# Altium PCB LPS.PcbDoc
Units mm, origin at the board's own origin, x right, y up, seen from the top; angles counter-clockwise.
Board outline 50 x 100 mm, 2 copper layers (Top Layer, Bottom Layer); 35 components, 20 nets, 87 pads, 8 vias.
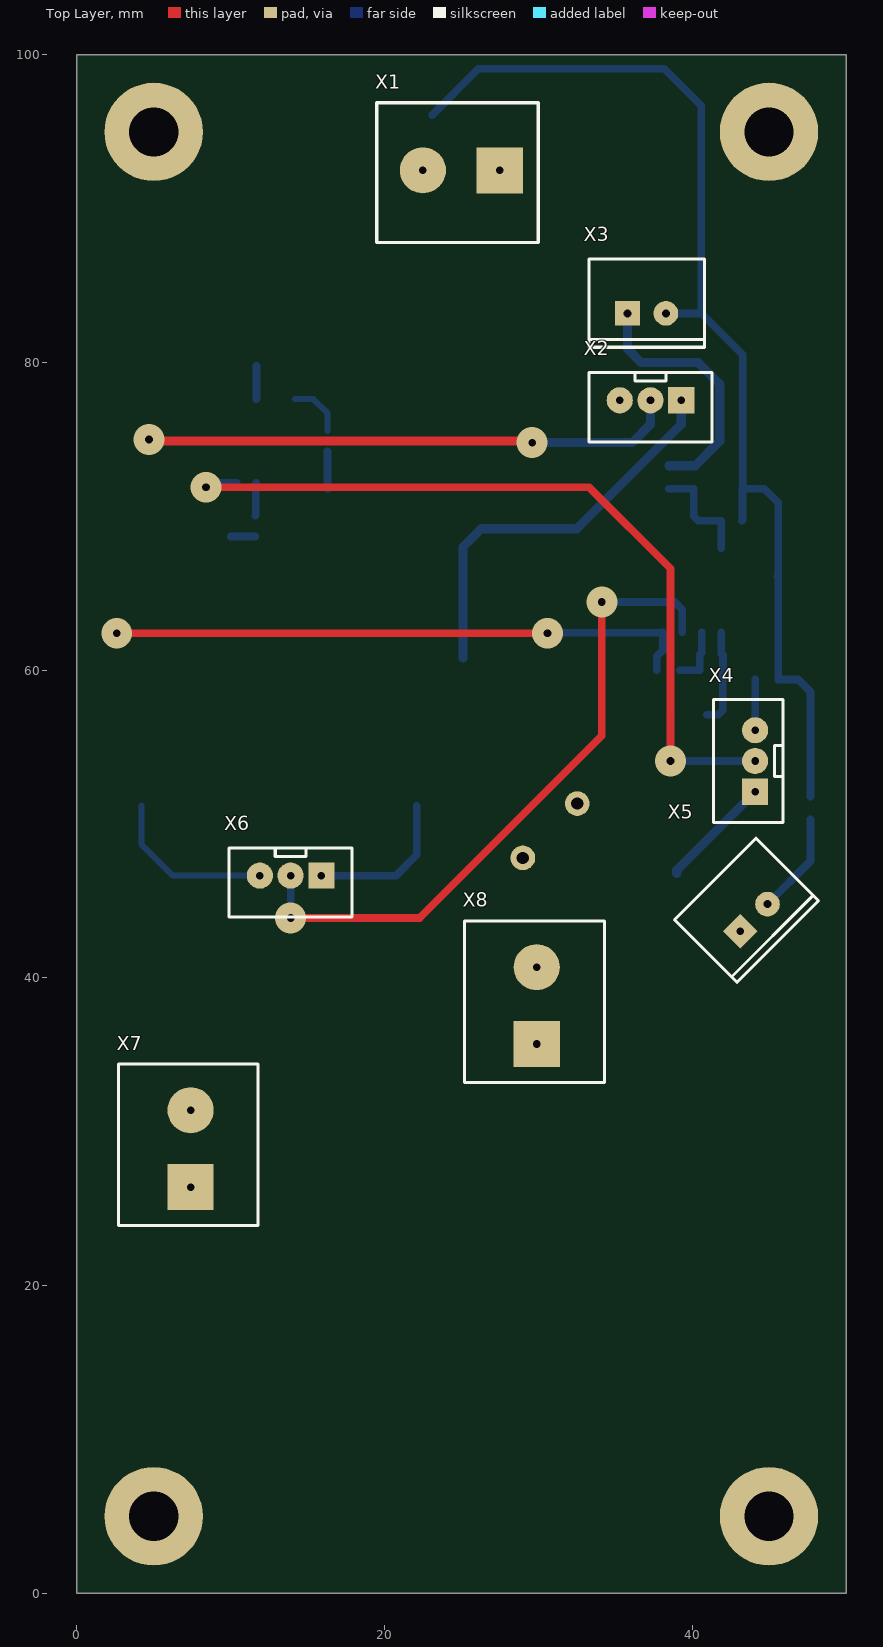
[diagram p0: Top Layer view]
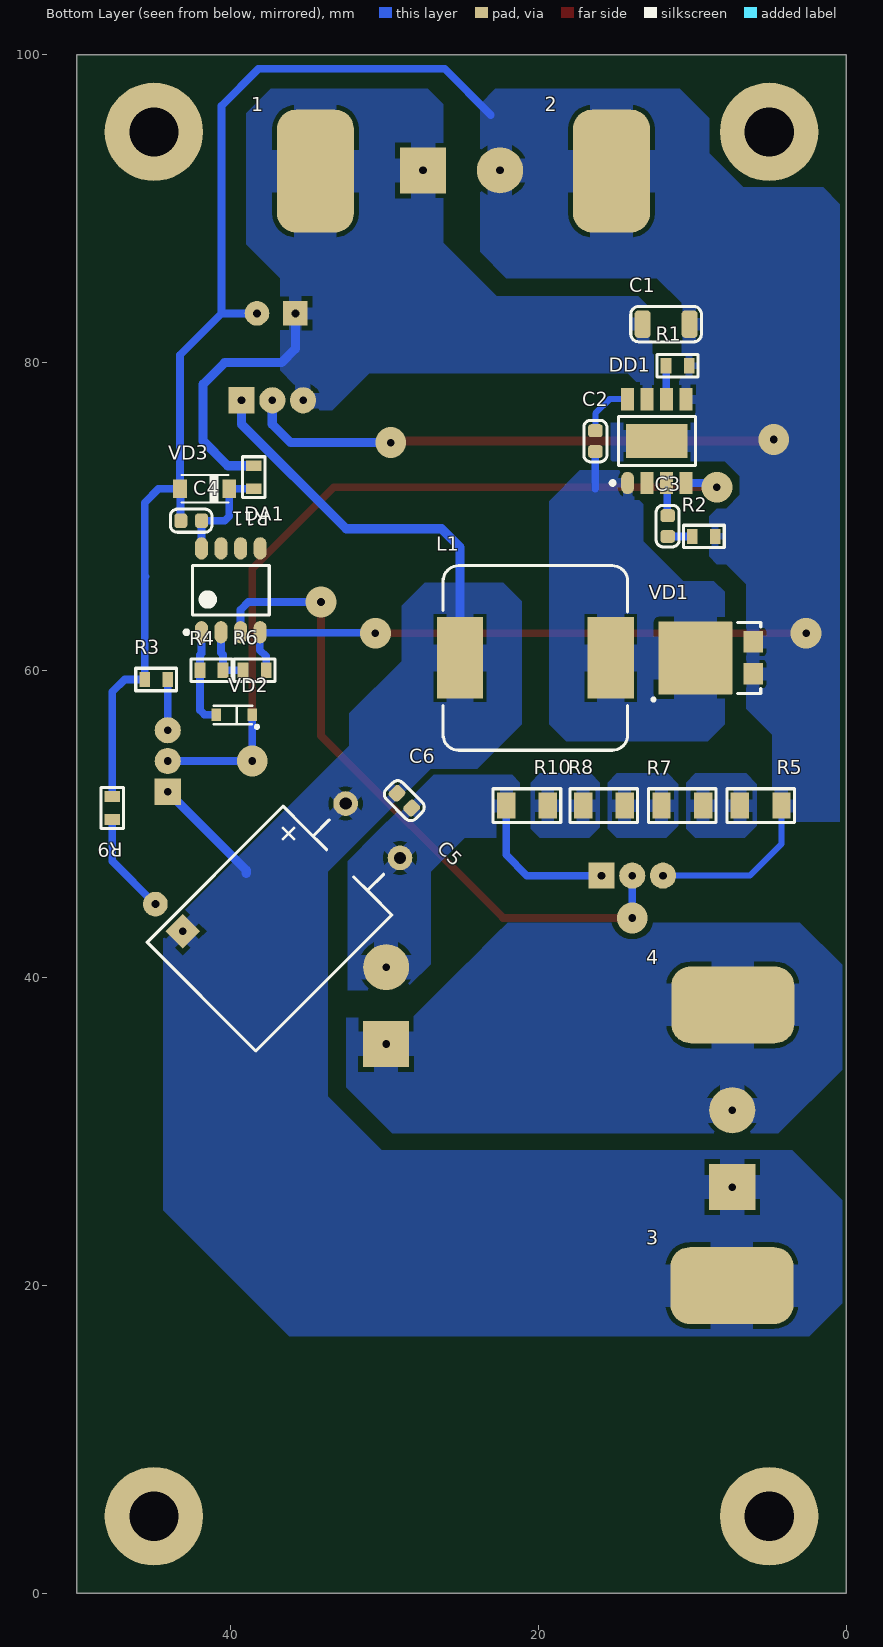
[diagram p1: Bottom Layer view, seen from below]
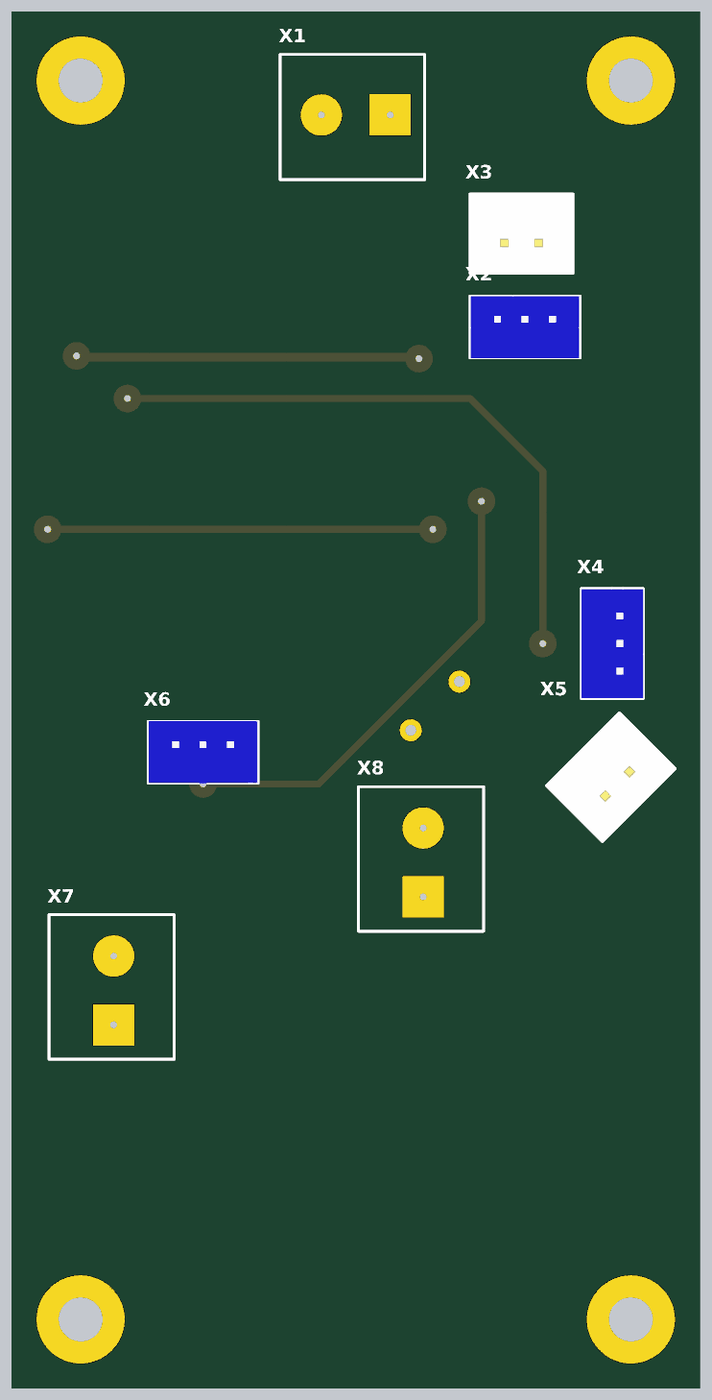
[diagram p2: 3D render of the assembled board from above, using the file's embedded part models]

## Layer stack, top to bottom
Top Solder: solder mask 0.0102, Solder Resist, Dk 3.5
Top Layer: signal copper 0.0356
Dielectric 1: dielectric 0.32, FR-4, Dk 4.8
Bottom Layer: signal copper 0.0356
Bottom Solder: solder mask 0.0102, Solder Resist, Dk 3.5

## Board outline
0.006,0.006 50.006,0.006 50.006,100.006 0.006,100.006

## Design rules (kind name [scope] priority, off if disabled: settings)
AcuteAngle min_acute_angle [OnCopper] p1: minimum=3.50000000000000E+0001 checktracksonly=FALSE // Минимальный угол между примитивами топологии
BoardOutlineClearance board_outline_clearance_std [NOT (OnLayer('Bottom Overlay') OR OnLayer('Top Overlay'))] p1: gap=0.25 ignorepadtopadclearanceinfootprint=FALSE except(0: Arc-SplitContinuation Track-SplitContinuation SMDPad-SplitContinuation THPad-SplitContinuation Via-SplitContinuation Fill-SplitContinuation Poly-SplitContinuation Region-SplitContinuation Text-SplitContinuation) // Отступ элементов топологии от края фрезеруемой печатной платы
Clearance clearance_poly_to_diff [InPolygonClass('FILL') vs InAnyDifferentialPair] p1: gap=0.2 ignorepadtopadclearanceinfootprint=FALSE except(0.25: Arc-Hole Track-Hole SMDPad-Hole THPad-Hole Via-Hole Fill-Hole Poly-Hole Region-Hole Text-Hole; 0.5: Arc-Poly Track-Poly SMDPad-Poly THPad-Poly Via-Poly) // Зазор между полигоном и дифференциальной парой
Clearance clearance_outer_35um_std [OnTopLayer OR OnBottomLayer] p2: gap=0.4 ignorepadtopadclearanceinfootprint=FALSE // Зазоры на внешних слоях
Clearance clearance_inner_35um_std [NOT (OnTopLayer Or OnBottomLayer)] p3: gap=0.2 ignorepadtopadclearanceinfootprint=FALSE except(0.25: Arc-Hole Track-Hole SMDPad-Hole THPad-Hole Via-Hole Fill-Hole Poly-Hole Region-Hole Text-Hole) // Зазоры на внутренних слоях
ComponentClearance [All] p1: gap=0 collisioncheckmode=3 verticalgap=0 showdistances=FALSE
DiffPairsRouting diff_pairs_routing [All] p1: maxlimit=0.127 minlimit=0.127 mostfreqgap=0.127 toplayer_minwidth=0.143 toplayer_maxwidth=0.143 toplayer_prefwidth=0.143 bottomlayer_minwidth=0.143 bottomlayer_maxwidth=0.143 bottomlayer_prefwidth=0.143 impedanceprofiledriven=TRUE impedanceprofileid={FD46899E-B5A2-4EF5-A302-5D2DB6A51F35} maxuncoupledlength=12.7 // Правила трассировки дифференциальных пар
HoleSize min_hole_size_std [IsPad] p1: absolutevalues=TRUE maxlimit=5.9 minlimit=0.6 maxpercent=80.000 minpercent=20.000 // Диаметр межслойного переходного отверстия
HoleSize min_hole_size_via_std [IsVia] p2: absolutevalues=TRUE maxlimit=5.9 minlimit=0.3 maxpercent=80.000 minpercent=20.000 // Минимальный диаметр монтажного отверстия
HoleToHoleClearance hole_to_hole_clearance_std [All] p1: gap=0.2 allowstackedmicrovias=FALSE // Минимальное расстояние между краями двух отверстий
MinimumAnnularRing min_via_ar_std [All] p1: minimumring=0.15 // Поясок площадки переходного отверстия (Annular ring VIA)
MinimumAnnularRing min_pad_ar_std [All] p2: minimumring=0.2 // Поясок монтажной контактной площадки (Annular ring PAD)
MinimumSolderMaskSliver min_solder_mask_bridge_std [All] p1: minsoldermaskwidth=0.15 // Мнимальная ширина масочного мостика
PlaneClearance plane_clearance_antipads [InAnyDifferentialPair] p1: clearance=0.5 // Отступ полигона от дифференциальных пар
PlaneClearance plane_clearance_35um_std [All] p2: clearance=0.2 // Отступ полигона (для слоя plane) от элементов топологии
PlaneConnect "plane_connect_to pad<=0.3" [(AsMM(PadXSize_AllLayers)<=0.301) or (AsMM(PadYSize_AllLayers)<=0.301)] p1 off: pad.planeconnectstyle=Relief pad.reliefexpansion=0.2 pad.reliefentries=4 pad.reliefconductorwidth=0.2 pad.reliefairgap=0.2 via.planeconnectstyle=Direct via.reliefexpansion=0.5 via.reliefentries=4 via.reliefconductorwidth=0.2 via.reliefairgap=0.2 // Правила подключения полигонов для падов от 0,3мм и меньше
PlaneConnect "plane_connect_to pad<=0.4" [(AsMM(PadXSize_AllLayers)<=0.401) or (AsMM(PadYSize_AllLayers)<=0.401)] p2 off: pad.planeconnectstyle=Relief pad.reliefexpansion=0.2 pad.reliefentries=4 pad.reliefconductorwidth=0.2 pad.reliefairgap=0.3 via.planeconnectstyle=Direct via.reliefexpansion=0.5 via.reliefentries=4 via.reliefconductorwidth=0.2 via.reliefairgap=0.2 // Правила подключения полигонов для падов от 0,4мм и меньше
PlaneConnect "plane_connect_to pad<=0.6" [(AsMM(PadXSize_AllLayers)<=0.601) or (AsMM(PadYSize_AllLayers)<=0.601)] p3 off: pad.planeconnectstyle=Relief pad.reliefexpansion=0.2 pad.reliefentries=4 pad.reliefconductorwidth=0.3 pad.reliefairgap=0.3 via.planeconnectstyle=Direct via.reliefexpansion=0.5 via.reliefentries=4 via.reliefconductorwidth=0.2 via.reliefairgap=0.2 // Правила подключения полигонов для падов от 0,6мм и меньше
PlaneConnect "plane_connect_to pad<=0.7" [(AsMM(PadXSize_AllLayers)<=0.701) or (AsMM(PadYSize_AllLayers)<=0.701)] p4 off: pad.planeconnectstyle=Relief pad.reliefexpansion=0.6 pad.reliefentries=4 pad.reliefconductorwidth=0.35 pad.reliefairgap=0.3 via.planeconnectstyle=Direct via.reliefexpansion=0.5 via.reliefentries=4 via.reliefconductorwidth=0.2 via.reliefairgap=0.2 // Правила подключения полигонов для падов от 0,7мм и меньше
PlaneConnect "plane_connect_to pad<=0.8" [(AsMM(PadXSize_AllLayers)<=0.801) or (AsMM(PadYSize_AllLayers)<=0.801)] p5 off: pad.planeconnectstyle=Relief pad.reliefexpansion=0.7 pad.reliefentries=4 pad.reliefconductorwidth=0.4 pad.reliefairgap=0.3 via.planeconnectstyle=Direct via.reliefexpansion=0.5 via.reliefentries=4 via.reliefconductorwidth=0.2 via.reliefairgap=0.2 // Правила подключения полигонов для падов от 0,8мм и меньше
PlaneConnect "plane_connect_to pad<=1" [(AsMM(PadXSize_AllLayers)<=1.01) or (AsMM(PadYSize_AllLayers)<=1.01)] p6 off: pad.planeconnectstyle=Relief pad.reliefexpansion=0.8 pad.reliefentries=4 pad.reliefconductorwidth=0.5 pad.reliefairgap=0.3 via.planeconnectstyle=Direct via.reliefexpansion=0.5 via.reliefentries=4 via.reliefconductorwidth=0.2 via.reliefairgap=0.2 // Правила подключения полигонов для падов от 1мм и меньше
PlaneConnect "plane_connect_to pad<=1.3" [(AsMM(PadXSize_AllLayers)<=1.31) or (AsMM(PadYSize_AllLayers)<=1.31)] p7 off: pad.planeconnectstyle=Relief pad.reliefexpansion=1.1 pad.reliefentries=4 pad.reliefconductorwidth=0.65 pad.reliefairgap=0.3 via.planeconnectstyle=Direct via.reliefexpansion=0.5 via.reliefentries=4 via.reliefconductorwidth=0.2 via.reliefairgap=0.2 // Правила подключения полигонов для падов от 1,3мм и меньше
PlaneConnect "plane_connect_to pad<=1.6" [(AsMM(PadXSize_AllLayers)<=1.61) or (AsMM(PadYSize_AllLayers)<=1.61)] p8 off: pad.planeconnectstyle=Relief pad.reliefexpansion=1.4 pad.reliefentries=4 pad.reliefconductorwidth=0.8 pad.reliefairgap=0.3 via.planeconnectstyle=Direct via.reliefexpansion=0.5 via.reliefentries=4 via.reliefconductorwidth=0.2 via.reliefairgap=0.2 // Правила подключения полигонов для падов от 1,6мм и меньше
PlaneConnect "plane_connect_to pad<=1.8" [(AsMM(PadXSize_AllLayers)<=1.81) or (AsMM(PadYSize_AllLayers)<=1.81)] p9 off: pad.planeconnectstyle=Relief pad.reliefexpansion=1.6 pad.reliefentries=4 pad.reliefconductorwidth=0.9 pad.reliefairgap=0.3 via.planeconnectstyle=Direct via.reliefexpansion=0.5 via.reliefentries=4 via.reliefconductorwidth=0.2 via.reliefairgap=0.2 // Правила подключения полигонов для падов от 1,8мм и меньше
PlaneConnect "plane_connect_to pad<=2" [(AsMM(PadXSize_AllLayers)<=2.01) or (AsMM(PadYSize_AllLayers)<=2.01)] p10 off: pad.planeconnectstyle=Relief pad.reliefexpansion=1.8 pad.reliefentries=4 pad.reliefconductorwidth=1 pad.reliefairgap=0.3 via.planeconnectstyle=Direct via.reliefexpansion=0.5 via.reliefentries=4 via.reliefconductorwidth=0.2 via.reliefairgap=0.2 // Правила подключения полигонов для падов от 2мм и меньше
PlaneConnect "plane_connect_to pad<=2.3" [(AsMM(PadXSize_AllLayers)<=2.31) or (AsMM(PadYSize_AllLayers)<=2.31)] p11 off: pad.planeconnectstyle=Relief pad.reliefexpansion=2.1 pad.reliefentries=4 pad.reliefconductorwidth=1.15 pad.reliefairgap=0.3 via.planeconnectstyle=Direct via.reliefexpansion=0.5 via.reliefentries=4 via.reliefconductorwidth=0.2 via.reliefairgap=0.2 // Правила подключения полигонов для падов от 2,3мм и меньше
PlaneConnect "plane_connect_to pad<=2.5" [(AsMM(PadXSize_AllLayers)<=2.51) or (AsMM(PadYSize_AllLayers)<=2.51)] p12 off: pad.planeconnectstyle=Relief pad.reliefexpansion=2.3 pad.reliefentries=4 pad.reliefconductorwidth=1.25 pad.reliefairgap=0.3 via.planeconnectstyle=Direct via.reliefexpansion=0.5 via.reliefentries=4 via.reliefconductorwidth=0.2 via.reliefairgap=0.2 // Правила подключения полигонов для падов от 2,5мм и меньше
PlaneConnect "plane_connect_to pad<=2.7" [(AsMM(PadXSize_AllLayers)<=2.71) or (AsMM(PadYSize_AllLayers)<=2.71)] p13 off: pad.planeconnectstyle=Relief pad.reliefexpansion=2.5 pad.reliefentries=4 pad.reliefconductorwidth=1.35 pad.reliefairgap=0.3 via.planeconnectstyle=Direct via.reliefexpansion=0.5 via.reliefentries=4 via.reliefconductorwidth=0.2 via.reliefairgap=0.2 // Правила подключения полигонов для падов от 2,7мм и меньше
PlaneConnect "plane_connect_to pad<=3" [(AsMM(PadXSize_AllLayers)<=3.01) or (AsMM(PadYSize_AllLayers)<=3.01)] p14 off: pad.planeconnectstyle=Relief pad.reliefexpansion=2.8 pad.reliefentries=4 pad.reliefconductorwidth=1.5 pad.reliefairgap=0.3 via.planeconnectstyle=Direct via.reliefexpansion=0.5 via.reliefentries=4 via.reliefconductorwidth=0.2 via.reliefairgap=0.2 // Правила подключения полигонов для падов от 3мм и меньше
PlaneConnect "plane_connect_to pad<=3.5" [(AsMM(PadXSize_AllLayers)<=3.51) or (AsMM(PadYSize_AllLayers)<=3.51)] p15 off: pad.planeconnectstyle=Relief pad.reliefexpansion=3.3 pad.reliefentries=4 pad.reliefconductorwidth=1.75 pad.reliefairgap=0.4 via.planeconnectstyle=Direct via.reliefexpansion=0.5 via.reliefentries=4 via.reliefconductorwidth=0.2 via.reliefairgap=0.2 // Правила подключения полигонов для падов от 3.5мм и меньше
PlaneConnect "plane_connect_to pad<=4" [(AsMM(PadXSize_AllLayers)<=4.01) or (AsMM(PadYSize_AllLayers)<=4.01)] p16 off: pad.planeconnectstyle=Relief pad.reliefexpansion=3.8 pad.reliefentries=4 pad.reliefconductorwidth=2 pad.reliefairgap=0.4 via.planeconnectstyle=Direct via.reliefexpansion=0.5 via.reliefentries=4 via.reliefconductorwidth=0.2 via.reliefairgap=0.2 // Правила подключения полигонов для падов от 4мм и меньше
PlaneConnect "plane_connect_to pad<=4.5" [(AsMM(PadXSize_AllLayers)<=4.51) or (AsMM(PadYSize_AllLayers)<=4.51)] p17 off: pad.planeconnectstyle=Relief pad.reliefexpansion=4.3 pad.reliefentries=4 pad.reliefconductorwidth=2.25 pad.reliefairgap=0.4 via.planeconnectstyle=Direct via.reliefexpansion=0.5 via.reliefentries=4 via.reliefconductorwidth=0.2 via.reliefairgap=0.2 // Правила подключения полигонов для падов от 4.5мм и меньше
PlaneConnect "plane_connect_to pad<=5" [(AsMM(PadXSize_AllLayers)<=5.01) or (AsMM(PadYSize_AllLayers)<=5.01)] p18 off: pad.planeconnectstyle=Relief pad.reliefexpansion=4.8 pad.reliefentries=4 pad.reliefconductorwidth=2.5 pad.reliefairgap=0.4 via.planeconnectstyle=Direct via.reliefexpansion=0.5 via.reliefentries=4 via.reliefconductorwidth=0.2 via.reliefairgap=0.2 // Правила подключения полигонов для падов от 5мм и меньше
PlaneConnect "plane_connect_to pad<=5.5" [(AsMM(PadXSize_AllLayers)<=5.51) or (AsMM(PadYSize_AllLayers)<=5.51)] p19 off: pad.planeconnectstyle=Relief pad.reliefexpansion=5.3 pad.reliefentries=4 pad.reliefconductorwidth=2.75 pad.reliefairgap=0.4 via.planeconnectstyle=Direct via.reliefexpansion=0.5 via.reliefentries=4 via.reliefconductorwidth=0.2 via.reliefairgap=0.2 // Правила подключения полигонов для падов от 5,5мм и меньше
PlaneConnect "plane_connect_to pad<=6" [(AsMM(PadXSize_AllLayers)<=6.01) or (AsMM(PadYSize_AllLayers)<=6.01)] p20 off: pad.planeconnectstyle=Relief pad.reliefexpansion=5.8 pad.reliefentries=4 pad.reliefconductorwidth=3 pad.reliefairgap=0.5 via.planeconnectstyle=Direct via.reliefexpansion=0.5 via.reliefentries=4 via.reliefconductorwidth=0.2 via.reliefairgap=0.2 // Правила подключения полигонов для падов от 6мм и меньше
PlaneConnect "plane_connect_to pad<=6.5" [(AsMM(PadXSize_AllLayers)<=6.51) or (AsMM(PadYSize_AllLayers)<=6.51)] p21 off: pad.planeconnectstyle=Relief pad.reliefexpansion=6.3 pad.reliefentries=4 pad.reliefconductorwidth=3.25 pad.reliefairgap=0.5 via.planeconnectstyle=Direct via.reliefexpansion=0.5 via.reliefentries=4 via.reliefconductorwidth=0.2 via.reliefairgap=0.2 // Правила подключения полигонов для падов от 6,5мм и меньше
PlaneConnect "plane_connect_to pad<=7" [(AsMM(PadXSize_AllLayers)<=7.01) or (AsMM(PadYSize_AllLayers)<=7.01)] p22 off: pad.planeconnectstyle=Relief pad.reliefexpansion=6.8 pad.reliefentries=4 pad.reliefconductorwidth=3.5 pad.reliefairgap=0.5 via.planeconnectstyle=Direct via.reliefexpansion=0.5 via.reliefentries=4 via.reliefconductorwidth=0.2 via.reliefairgap=0.2 // Правила подключения полигонов для падов от 7мм и меньше
PlaneConnect "plane_connect_to pad<=7.5" [(AsMM(PadXSize_AllLayers)<=7.51) or (AsMM(PadYSize_AllLayers)<=7.51)] p23 off: pad.planeconnectstyle=Relief pad.reliefexpansion=7.3 pad.reliefentries=4 pad.reliefconductorwidth=3.75 pad.reliefairgap=0.5 via.planeconnectstyle=Direct via.reliefexpansion=0.5 via.reliefentries=4 via.reliefconductorwidth=0.2 via.reliefairgap=0.2 // Правила подключения полигонов для падов от 7,5мм и меньше
PlaneConnect "plane_connect_to pad<=8" [(AsMM(PadXSize_AllLayers)<=8.01) or (AsMM(PadYSize_AllLayers)<=8.01)] p24 off: pad.planeconnectstyle=Relief pad.reliefexpansion=7.8 pad.reliefentries=4 pad.reliefconductorwidth=4 pad.reliefairgap=0.5 via.planeconnectstyle=Direct via.reliefexpansion=0.5 via.reliefentries=4 via.reliefconductorwidth=0.2 via.reliefairgap=0.2 // Правила подключения полигонов для падов от 8мм и меньше
PlaneConnect "plane_connect_to pad<=8.5" [(AsMM(PadXSize_AllLayers)<=8.51) or (AsMM(PadYSize_AllLayers)<=8.51)] p25 off: pad.planeconnectstyle=Relief pad.reliefexpansion=8.3 pad.reliefentries=4 pad.reliefconductorwidth=4.25 pad.reliefairgap=0.5 via.planeconnectstyle=Direct via.reliefexpansion=0.5 via.reliefentries=4 via.reliefconductorwidth=0.2 via.reliefairgap=0.2 // Правила подключения полигонов для падов от 8,5мм и меньше
PlaneConnect "plane_connect_to pad<=9" [(AsMM(PadXSize_AllLayers)<=9.01) or (AsMM(PadYSize_AllLayers)<=9.01)] p26 off: pad.planeconnectstyle=Relief pad.reliefexpansion=8.8 pad.reliefentries=4 pad.reliefconductorwidth=4.5 pad.reliefairgap=0.5 via.planeconnectstyle=Direct via.reliefexpansion=0.5 via.reliefentries=4 via.reliefconductorwidth=0.2 via.reliefairgap=0.2 // Правила подключения полигонов для падов от 9мм и меньше
PlaneConnect "plane_connect_to pad<=9.5" [(AsMM(PadXSize_AllLayers)<=9.51) or (AsMM(PadYSize_AllLayers)<=9.51)] p27 off: pad.planeconnectstyle=Relief pad.reliefexpansion=9.3 pad.reliefentries=4 pad.reliefconductorwidth=4.75 pad.reliefairgap=0.5 via.planeconnectstyle=Direct via.reliefexpansion=0.5 via.reliefentries=4 via.reliefconductorwidth=0.2 via.reliefairgap=0.2 // Правила подключения полигонов для падов от 9,5мм и меньше
PlaneConnect "plane_connect_to pad<=10" [(AsMM(PadXSize_AllLayers)<=10.01) or (AsMM(PadYSize_AllLayers)<=10.01)] p28 off: pad.planeconnectstyle=Relief pad.reliefexpansion=9.8 pad.reliefentries=4 pad.reliefconductorwidth=5 pad.reliefairgap=0.5 via.planeconnectstyle=Direct via.reliefexpansion=0.5 via.reliefentries=4 via.reliefconductorwidth=0.2 via.reliefairgap=0.2 // Правила подключения полигонов для падов от 10мм и меньше
PlaneConnect plane_connect_to_pad [All] p29 off: pad.planeconnectstyle=Relief pad.reliefexpansion=0.5 pad.reliefentries=4 pad.reliefconductorwidth=0.2 pad.reliefairgap=0.2 via.planeconnectstyle=Direct via.reliefexpansion=0.5 via.reliefentries=4 via.reliefconductorwidth=0.2 via.reliefairgap=0.2 // Правила подключения полигонов общие
PlaneConnect [All] p30 off: planeconnectstyle=Relief reliefexpansion=0.5 reliefentries=4 reliefconductorwidth=0.2 reliefairgap=0.2
PolygonConnect poly_connect_direct [InPolygonClass('DIRECT')] p1: connectstyle=Direct reliefconductorwidth=0.254 reliefentries=4 polygonreliefangle="90 Angle" airgapwidth=0.254 // Подключение без термобарьеров к полигонам, относящимся к классу DIRECT
PolygonConnect poly_connect_to_pad<=0.3 [(AsMM(PadXSize_AllLayers)<=0.301) or (AsMM(PadYSize_AllLayers)<=0.301)] p2: thpad.connectstyle=Relief thpad.reliefconductorwidth=0.2 thpad.reliefentries=4 thpad.polygonreliefangle="90 Angle" thpad.airgapwidth=0.2 smdpad.connectstyle=Relief smdpad.reliefconductorwidth=0.2 smdpad.reliefentries=4 smdpad.polygonreliefangle="90 Angle" smdpad.airgapwidth=0.2 via.connectstyle=Direct via.reliefconductorwidth=0.254 via.reliefentries=4 via.polygonreliefangle="90 Angle" via.airgapwidth=0.254 // Правила подключения полигонов для падов от 0,3мм и меньше
PolygonConnect poly_connect_to_pad<=0.4 [(AsMM(PadXSize_AllLayers)<=0.401) or (AsMM(PadYSize_AllLayers)<=0.401)] p3: thpad.connectstyle=Relief thpad.reliefconductorwidth=0.26 thpad.reliefentries=4 thpad.polygonreliefangle="90 Angle" thpad.airgapwidth=0.2 smdpad.connectstyle=Relief smdpad.reliefconductorwidth=0.26 smdpad.reliefentries=4 smdpad.polygonreliefangle="90 Angle" smdpad.airgapwidth=0.2 via.connectstyle=Direct via.reliefconductorwidth=0.254 via.reliefentries=4 via.polygonreliefangle="90 Angle" via.airgapwidth=0.254 // Правила подключения полигонов для падов от 0,4 и меньше
PolygonConnect poly_connect_to_pad<=0.6 [(AsMM(PadXSize_AllLayers)<=0.601) or (AsMM(PadYSize_AllLayers)<=0.601)] p4: thpad.connectstyle=Relief thpad.reliefconductorwidth=0.33 thpad.reliefentries=4 thpad.polygonreliefangle="90 Angle" thpad.airgapwidth=0.2 smdpad.connectstyle=Relief smdpad.reliefconductorwidth=0.33 smdpad.reliefentries=4 smdpad.polygonreliefangle="90 Angle" smdpad.airgapwidth=0.2 via.connectstyle=Direct via.reliefconductorwidth=0.254 via.reliefentries=4 via.polygonreliefangle="90 Angle" via.airgapwidth=0.254 // Правила подключения полигонов для падов от 0,6мм и меньше
PolygonConnect poly_connect_to_pad<=0.7 [(AsMM(PadXSize_AllLayers)<=0.701) or (AsMM(PadYSize_AllLayers)<=0.701)] p5: thpad.connectstyle=Relief thpad.reliefconductorwidth=0.46 thpad.reliefentries=4 thpad.polygonreliefangle="90 Angle" thpad.airgapwidth=0.2 smdpad.connectstyle=Relief smdpad.reliefconductorwidth=0.46 smdpad.reliefentries=4 smdpad.polygonreliefangle="90 Angle" smdpad.airgapwidth=0.2 via.connectstyle=Direct via.reliefconductorwidth=0.254 via.reliefentries=4 via.polygonreliefangle="90 Angle" via.airgapwidth=0.254 // Правила подключения полигонов для падов от 0,7мм и меньше
PolygonConnect poly_connect_to_pad<=0.8 [(AsMM(PadXSize_AllLayers)<=0.8)or(AsMM(PadYSize_AllLayers)<=0.8)] p6: thpad.connectstyle=Relief thpad.reliefconductorwidth=0.53 thpad.reliefentries=4 thpad.polygonreliefangle="90 Angle" thpad.airgapwidth=0.3 smdpad.connectstyle=Relief smdpad.reliefconductorwidth=0.53 smdpad.reliefentries=4 smdpad.polygonreliefangle="90 Angle" smdpad.airgapwidth=0.2 via.connectstyle=Direct via.reliefconductorwidth=0.254 via.reliefentries=4 via.polygonreliefangle="90 Angle" via.airgapwidth=0.254 // Правила подключения полигонов для падов от 0,8мм и меньше
PolygonConnect poly_connect_to_pad<=1 [(AsMM(PadXSize_AllLayers)<=1.01)or(AsMM(PadYSize_AllLayers)<=1.01)] p7: thpad.connectstyle=Relief thpad.reliefconductorwidth=0.6 thpad.reliefentries=4 thpad.polygonreliefangle="90 Angle" thpad.airgapwidth=0.3 smdpad.connectstyle=Relief smdpad.reliefconductorwidth=0.6 smdpad.reliefentries=4 smdpad.polygonreliefangle="90 Angle" smdpad.airgapwidth=0.2 via.connectstyle=Direct via.reliefconductorwidth=0.254 via.reliefentries=4 via.polygonreliefangle="90 Angle" via.airgapwidth=0.254 // Правила подключения полигонов для падов от 1мм и меньше
PolygonConnect poly_connect_to_pad<=1.3 [(AsMM(PadXSize_AllLayers)<=1.31)or(AsMM(PadYSize_AllLayers)<=1.31)] p8: thpad.connectstyle=Relief thpad.reliefconductorwidth=0.66 thpad.reliefentries=4 thpad.polygonreliefangle="90 Angle" thpad.airgapwidth=0.3 smdpad.connectstyle=Relief smdpad.reliefconductorwidth=0.86 smdpad.reliefentries=4 smdpad.polygonreliefangle="90 Angle" smdpad.airgapwidth=0.2 via.connectstyle=Direct via.reliefconductorwidth=0.254 via.reliefentries=4 via.polygonreliefangle="90 Angle" via.airgapwidth=0.254 // Правила подключения полигонов для падов от 1,3мм и меньше
PolygonConnect poly_connect_to_pad<=1.6 [(AsMM(PadXSize_AllLayers)<=1.61)or(AsMM(PadYSize_AllLayers)<=1.61)] p9: thpad.connectstyle=Relief thpad.reliefconductorwidth=0.8 thpad.reliefentries=4 thpad.polygonreliefangle="90 Angle" thpad.airgapwidth=0.3 smdpad.connectstyle=Relief smdpad.reliefconductorwidth=1 smdpad.reliefentries=4 smdpad.polygonreliefangle="90 Angle" smdpad.airgapwidth=0.2 via.connectstyle=Direct via.reliefconductorwidth=0.254 via.reliefentries=4 via.polygonreliefangle="90 Angle" via.airgapwidth=0.254 // Правила подключения полигонов для падов от 1,6мм и меньше
PolygonConnect poly_connect_to_pad<=1.8 [(AsMM(PadXSize_AllLayers)<=1.8)or(AsMM(PadYSize_AllLayers)<=1.8)] p10: thpad.connectstyle=Relief thpad.reliefconductorwidth=1 thpad.reliefentries=4 thpad.polygonreliefangle="90 Angle" thpad.airgapwidth=0.3 smdpad.connectstyle=Relief smdpad.reliefconductorwidth=1.2 smdpad.reliefentries=4 smdpad.polygonreliefangle="90 Angle" smdpad.airgapwidth=0.2 via.connectstyle=Direct via.reliefconductorwidth=0.254 via.reliefentries=4 via.polygonreliefangle="90 Angle" via.airgapwidth=0.254 // Правила подключения полигонов для падов от 1,8мм и меньше
PolygonConnect poly_connect_to_pad<=2 [(AsMM(PadXSize_AllLayers)<=2.01)or(AsMM(PadYSize_AllLayers)<=2.01)] p11: thpad.connectstyle=Relief thpad.reliefconductorwidth=1.1 thpad.reliefentries=4 thpad.polygonreliefangle="90 Angle" thpad.airgapwidth=0.3 smdpad.connectstyle=Relief smdpad.reliefconductorwidth=1.4 smdpad.reliefentries=4 smdpad.polygonreliefangle="90 Angle" smdpad.airgapwidth=0.2 via.connectstyle=Direct via.reliefconductorwidth=0.254 via.reliefentries=4 via.polygonreliefangle="90 Angle" via.airgapwidth=0.254 // Правила подключения полигонов для падов от 2мм и меньше
PolygonConnect poly_connect_to_pad<=2.3 [(AsMM(PadXSize_AllLayers)<=2.31)or(AsMM(PadYSize_AllLayers)<=2.31)] p12: thpad.connectstyle=Relief thpad.reliefconductorwidth=1.2 thpad.reliefentries=4 thpad.polygonreliefangle="90 Angle" thpad.airgapwidth=0.3 smdpad.connectstyle=Relief smdpad.reliefconductorwidth=1.4 smdpad.reliefentries=4 smdpad.polygonreliefangle="90 Angle" smdpad.airgapwidth=0.2 via.connectstyle=Direct via.reliefconductorwidth=0.254 via.reliefentries=4 via.polygonreliefangle="90 Angle" via.airgapwidth=0.254 // Правила подключения полигонов для падов от 2,3мм и меньше
PolygonConnect poly_connect_to_pad<=2.5 [(AsMM(PadXSize_AllLayers)<=2.51)or(AsMM(PadYSize_AllLayers)<=2.51)] p13: thpad.connectstyle=Relief thpad.reliefconductorwidth=1.2 thpad.reliefentries=4 thpad.polygonreliefangle="90 Angle" thpad.airgapwidth=0.3 smdpad.connectstyle=Relief smdpad.reliefconductorwidth=1.4 smdpad.reliefentries=4 smdpad.polygonreliefangle="90 Angle" smdpad.airgapwidth=0.2 via.connectstyle=Direct via.reliefconductorwidth=0.254 via.reliefentries=4 via.polygonreliefangle="90 Angle" via.airgapwidth=0.254 // Правила подключения полигонов для падов от 2,5мм и меньше
PolygonConnect poly_connect_to_pad<=2.7 [(AsMM(PadXSize_AllLayers)<=2.71)or(AsMM(PadYSize_AllLayers)<=2.71)] p14: thpad.connectstyle=Relief thpad.reliefconductorwidth=1.4 thpad.reliefentries=4 thpad.polygonreliefangle="90 Angle" thpad.airgapwidth=0.3 smdpad.connectstyle=Relief smdpad.reliefconductorwidth=1.6 smdpad.reliefentries=4 smdpad.polygonreliefangle="90 Angle" smdpad.airgapwidth=0.2 via.connectstyle=Direct via.reliefconductorwidth=0.254 via.reliefentries=4 via.polygonreliefangle="90 Angle" via.airgapwidth=0.254 // Правила подключения полигонов для падов от 2,7мм и меньше
PolygonConnect poly_connect_to_pad<=3 [(AsMM(PadXSize_AllLayers)<=3.01)or(AsMM(PadYSize_AllLayers)<=3.01)] p15: thpad.connectstyle=Relief thpad.reliefconductorwidth=1.6 thpad.reliefentries=4 thpad.polygonreliefangle="90 Angle" thpad.airgapwidth=0.3 smdpad.connectstyle=Relief smdpad.reliefconductorwidth=1.8 smdpad.reliefentries=4 smdpad.polygonreliefangle="90 Angle" smdpad.airgapwidth=0.2 via.connectstyle=Direct via.reliefconductorwidth=0.254 via.reliefentries=4 via.polygonreliefangle="90 Angle" via.airgapwidth=0.254 // Правила подключения полигонов для падов от 3мм и меньше
PolygonConnect poly_connect_to_pad<=3.5 [(AsMM(PadXSize_AllLayers)<=3.51)or(AsMM(PadYSize_AllLayers)<=3.51)] p16: thpad.connectstyle=Relief thpad.reliefconductorwidth=1.8 thpad.reliefentries=4 thpad.polygonreliefangle="90 Angle" thpad.airgapwidth=0.4 smdpad.connectstyle=Relief smdpad.reliefconductorwidth=2 smdpad.reliefentries=4 smdpad.polygonreliefangle="90 Angle" smdpad.airgapwidth=0.3 via.connectstyle=Direct via.reliefconductorwidth=0.254 via.reliefentries=4 via.polygonreliefangle="90 Angle" via.airgapwidth=0.254 // Правила подключения полигонов для падов от 3,5мм и меньше
PolygonConnect poly_connect_to_pad<=4 [(AsMM(PadXSize_AllLayers)<=4.01)or(AsMM(PadYSize_AllLayers)<=4.01)] p17: thpad.connectstyle=Relief thpad.reliefconductorwidth=2.1 thpad.reliefentries=4 thpad.polygonreliefangle="90 Angle" thpad.airgapwidth=0.4 smdpad.connectstyle=Relief smdpad.reliefconductorwidth=2.3 smdpad.reliefentries=4 smdpad.polygonreliefangle="90 Angle" smdpad.airgapwidth=0.3 via.connectstyle=Direct via.reliefconductorwidth=0.254 via.reliefentries=4 via.polygonreliefangle="90 Angle" via.airgapwidth=0.254 // Правила подключения полигонов для падов от 4мм и меньше
PolygonConnect poly_connect_to_pad<=4.5 [(AsMM(PadXSize_AllLayers)<=4.51)or(AsMM(PadYSize_AllLayers)<=4.51)] p18: thpad.connectstyle=Relief thpad.reliefconductorwidth=2.35 thpad.reliefentries=4 thpad.polygonreliefangle="90 Angle" thpad.airgapwidth=0.4 smdpad.connectstyle=Relief smdpad.reliefconductorwidth=2.55 smdpad.reliefentries=4 smdpad.polygonreliefangle="90 Angle" smdpad.airgapwidth=0.3 via.connectstyle=Direct via.reliefconductorwidth=0.254 via.reliefentries=4 via.polygonreliefangle="90 Angle" via.airgapwidth=0.254 // Правила подключения полигонов для падов от 4.5мм и меньше
PolygonConnect poly_connect_to_pad<=5 [(AsMM(PadXSize_AllLayers)<=5.01)or(AsMM(PadYSize_AllLayers)<=5.01)] p19: thpad.connectstyle=Relief thpad.reliefconductorwidth=2.6 thpad.reliefentries=4 thpad.polygonreliefangle="90 Angle" thpad.airgapwidth=0.4 smdpad.connectstyle=Relief smdpad.reliefconductorwidth=2.8 smdpad.reliefentries=4 smdpad.polygonreliefangle="90 Angle" smdpad.airgapwidth=0.3 via.connectstyle=Direct via.reliefconductorwidth=0.254 via.reliefentries=4 via.polygonreliefangle="90 Angle" via.airgapwidth=0.254 // Правила подключения полигонов для падов от 5мм и меньше
PolygonConnect poly_connect_to_pad<=5.5 [(AsMM(PadXSize_AllLayers)<=5.51)or(AsMM(PadYSize_AllLayers)<=5.51)] p20: thpad.connectstyle=Relief thpad.reliefconductorwidth=2.85 thpad.reliefentries=4 thpad.polygonreliefangle="90 Angle" thpad.airgapwidth=0.4 smdpad.connectstyle=Relief smdpad.reliefconductorwidth=3.05 smdpad.reliefentries=4 smdpad.polygonreliefangle="90 Angle" smdpad.airgapwidth=0.3 via.connectstyle=Direct via.reliefconductorwidth=0.254 via.reliefentries=4 via.polygonreliefangle="90 Angle" via.airgapwidth=0.254 // Правила подключения полигонов для падов от 5.5мм и меньше
PolygonConnect poly_connect_to_pad<=6 [(AsMM(PadXSize_AllLayers)<=6.01)or(AsMM(PadYSize_AllLayers)<=6.01)] p21: thpad.connectstyle=Relief thpad.reliefconductorwidth=3.1 thpad.reliefentries=4 thpad.polygonreliefangle="90 Angle" thpad.airgapwidth=0.5 smdpad.connectstyle=Relief smdpad.reliefconductorwidth=3.3 smdpad.reliefentries=4 smdpad.polygonreliefangle="90 Angle" smdpad.airgapwidth=0.4 via.connectstyle=Direct via.reliefconductorwidth=0.254 via.reliefentries=4 via.polygonreliefangle="90 Angle" via.airgapwidth=0.254 // Правила подключения полигонов для падов от 6мм и меньше
PolygonConnect poly_connect_to_pad<=6.5 [(AsMM(PadXSize_AllLayers)<=6.51)or(AsMM(PadYSize_AllLayers)<=6.51)] p22: thpad.connectstyle=Relief thpad.reliefconductorwidth=3.4 thpad.reliefentries=4 thpad.polygonreliefangle="90 Angle" thpad.airgapwidth=0.5 smdpad.connectstyle=Relief smdpad.reliefconductorwidth=3.6 smdpad.reliefentries=4 smdpad.polygonreliefangle="90 Angle" smdpad.airgapwidth=0.4 via.connectstyle=Direct via.reliefconductorwidth=0.254 via.reliefentries=4 via.polygonreliefangle="90 Angle" via.airgapwidth=0.254 // Правила подключения полигонов для падов от 6,5мм и меньше
PolygonConnect poly_connect_to_pad<=7 [(AsMM(PadXSize_AllLayers)<7.01)or(AsMM(PadYSize_AllLayers)<=7.01)] p23: thpad.connectstyle=Relief thpad.reliefconductorwidth=3.6 thpad.reliefentries=4 thpad.polygonreliefangle="90 Angle" thpad.airgapwidth=0.5 smdpad.connectstyle=Relief smdpad.reliefconductorwidth=3.8 smdpad.reliefentries=4 smdpad.polygonreliefangle="90 Angle" smdpad.airgapwidth=0.4 via.connectstyle=Direct via.reliefconductorwidth=0.254 via.reliefentries=4 via.polygonreliefangle="90 Angle" via.airgapwidth=0.254 // Правила подключения полигонов для падов от 7мм и меньше
PolygonConnect poly_connect_to_pad<=7.5 [(AsMM(PadXSize_AllLayers)<7.51)or(AsMM(PadYSize_AllLayers)<=7.51)] p24: thpad.connectstyle=Relief thpad.reliefconductorwidth=3.9 thpad.reliefentries=4 thpad.polygonreliefangle="90 Angle" thpad.airgapwidth=0.5 smdpad.connectstyle=Relief smdpad.reliefconductorwidth=4.1 smdpad.reliefentries=4 smdpad.polygonreliefangle="90 Angle" smdpad.airgapwidth=0.4 via.connectstyle=Direct via.reliefconductorwidth=0.254 via.reliefentries=4 via.polygonreliefangle="90 Angle" via.airgapwidth=0.254 // Правила подключения полигонов для падов от 7,5мм и меньше
PolygonConnect poly_connect_to_pad<=8 [(AsMM(PadXSize_AllLayers)<8.01)or(AsMM(PadYSize_AllLayers)<=8.01)] p25: thpad.connectstyle=Relief thpad.reliefconductorwidth=4.15 thpad.reliefentries=4 thpad.polygonreliefangle="90 Angle" thpad.airgapwidth=0.5 smdpad.connectstyle=Relief smdpad.reliefconductorwidth=4.35 smdpad.reliefentries=4 smdpad.polygonreliefangle="90 Angle" smdpad.airgapwidth=0.5 via.connectstyle=Direct via.reliefconductorwidth=0.254 via.reliefentries=4 via.polygonreliefangle="90 Angle" via.airgapwidth=0.254 // Правила подключения полигонов для падов от 8мм и меньше
PolygonConnect poly_connect_to_pad<=8.5 [(AsMM(PadXSize_AllLayers)<8.51)or(AsMM(PadYSize_AllLayers)<=8.51)] p26: thpad.connectstyle=Relief thpad.reliefconductorwidth=4.4 thpad.reliefentries=4 thpad.polygonreliefangle="90 Angle" thpad.airgapwidth=0.5 smdpad.connectstyle=Relief smdpad.reliefconductorwidth=4.6 smdpad.reliefentries=4 smdpad.polygonreliefangle="90 Angle" smdpad.airgapwidth=0.4 via.connectstyle=Direct via.reliefconductorwidth=0.254 via.reliefentries=4 via.polygonreliefangle="90 Angle" via.airgapwidth=0.254 // Правила подключения полигонов для падов от 8,5мм и меньше
PolygonConnect poly_connect_to_pad<=9 [(AsMM(PadXSize_AllLayers)<9.01)or(AsMM(PadYSize_AllLayers)<=9.01)] p27: thpad.connectstyle=Relief thpad.reliefconductorwidth=4.7 thpad.reliefentries=4 thpad.polygonreliefangle="90 Angle" thpad.airgapwidth=0.5 smdpad.connectstyle=Relief smdpad.reliefconductorwidth=4.9 smdpad.reliefentries=4 smdpad.polygonreliefangle="90 Angle" smdpad.airgapwidth=0.4 via.connectstyle=Direct via.reliefconductorwidth=0.254 via.reliefentries=4 via.polygonreliefangle="90 Angle" via.airgapwidth=0.254 // Правила подключения полигонов для падов от 9мм и меньше
PolygonConnect poly_connect_to_pad<=9.5 [(AsMM(PadXSize_AllLayers)<9.51)or(AsMM(PadYSize_AllLayers)<=9.51)] p28: thpad.connectstyle=Relief thpad.reliefconductorwidth=5 thpad.reliefentries=4 thpad.polygonreliefangle="90 Angle" thpad.airgapwidth=0.5 smdpad.connectstyle=Relief smdpad.reliefconductorwidth=5.2 smdpad.reliefentries=4 smdpad.polygonreliefangle="90 Angle" smdpad.airgapwidth=0.4 via.connectstyle=Direct via.reliefconductorwidth=0.254 via.reliefentries=4 via.polygonreliefangle="90 Angle" via.airgapwidth=0.254 // Правила подключения полигонов для падов от 9,5мм и меньше
PolygonConnect poly_connect_to_pad<=10 [(AsMM(PadXSize_AllLayers)<7.51)or(AsMM(PadYSize_AllLayers)<=7.51)] p29: thpad.connectstyle=Relief thpad.reliefconductorwidth=5.2 thpad.reliefentries=4 thpad.polygonreliefangle="90 Angle" thpad.airgapwidth=0.5 smdpad.connectstyle=Relief smdpad.reliefconductorwidth=5.4 smdpad.reliefentries=4 smdpad.polygonreliefangle="90 Angle" smdpad.airgapwidth=0.4 via.connectstyle=Direct via.reliefconductorwidth=0.254 via.reliefentries=4 via.polygonreliefangle="90 Angle" via.airgapwidth=0.254 // Правила подключения полигонов для падов от 10мм и меньше
PolygonConnect poly_connect_to_pad [All] p30: thpad.connectstyle=Relief thpad.reliefconductorwidth=0.25 thpad.reliefentries=4 thpad.polygonreliefangle="90 Angle" thpad.airgapwidth=0.2 smdpad.connectstyle=Relief smdpad.reliefconductorwidth=0.25 smdpad.reliefentries=4 smdpad.polygonreliefangle="90 Angle" smdpad.airgapwidth=0.2 via.connectstyle=Direct via.reliefconductorwidth=0.25 via.reliefentries=4 via.polygonreliefangle="90 Angle" via.airgapwidth=0.2 // Правила подключения полигонов общие
RoutingCorners [All] p1 off: cornerstyle=45-Degree minsetback=2.5 maxsetback=2.5
RoutingVias [All] p1: holewidth=0.3 width=0.6 viastyle="Through Hole" minholewidth=0.3 minwidth=0.6 maxholewidth=5.9 maxwidth=6.4
SilkToSilkClearance silk_to_silk_clearance_std [All] p1 off: silktosilkclearance=0.15 // Отступ текста шелкографии от других примитивов шелкографии
SilkToSolderMaskClearance silk_to_solder_mask_clearance_std [IsPad] p1 off: minsilkscreentomaskgap=0.15 clearancetoexposedcopper=FALSE // Минимальное расстояние между элементами шелкографии и вскрытой медью
SolderMaskExpansion solder_mask_expansion_std [All] p1: expansion=0.05 istentingtop=FALSE // Припуск паяльной масски
UnRoutedNet [All] p1: checkbadconnections=TRUE
Width width_35um_std [All] p1: maxlimit=10 minlimit=0.2 preferedwidth=0.2 checkconnectedcopper=TRUE // Ширина проводников (общая)
19 further rules are at their usual default settings.

## Components (designator, comment, footprint, x,y, rotation, side; value= is the part's Value field where it differs from the comment)
1 "SOLDER_PAD" PAD_5_8mm 34.5,92.45 r180 bottom
2 "SOLDER_PAD" PAD_5_8mm 15.25,92.45 r180 bottom
3 "SOLDER_PAD" PAD_5_8mm 7.421,20 r270 bottom
4 "SOLDER_PAD" PAD_5_8mm 7.367,38.25 r270 bottom
C1 "10мк" C1206 11.7,82.5 r0 bottom
C2 "0,1мк" C0603 16.3,74.9 r270 bottom
C3 "100" C0603 11.6,69.375 r90 bottom
C4 "0,1мк" C0603 42.575,69.725 r180 bottom
C5 "150мк" CAPALUM_10x12.5 36.106,44.583 r135 bottom
C6 "0,1мк" C0603 28.723,51.523 r45 bottom
DA1 "LMV358IDR" SOIC-8 40,65.2 r90 bottom
DD1 "MP1584EN" "SOIC-8 with PAD" 14.205,72.175 r90 bottom
L1 "CDRH124NP-4R7MC" CDRH124 20.2,60.8 r0 bottom value=4,7мк
R1 "220к" R0603 10.95,79.8 r0 bottom
R2 "100к" R0603 9.25,68.7 r180 bottom
R3 "4,7к" R0603 44.85,59.4 r180 bottom
R4 "1,1к" R0603 41.255,60.013 r180 bottom
R5 "0,025" R1206 5.55,51.2 r0 bottom
R6 "1,1к" R0603 38.45,60 r180 bottom
R7 "0,025" R1206 10.65,51.2 r0 bottom
R8 "0,025" R1206 15.75,51.2 r0 bottom
R9 "1к" R0603 47.7,51.05 r270 bottom
R10 "0,025" R1206 20.75,51.2 r0 bottom
R11 "47к" R0603 38.5,72.55 r270 bottom
VD1 "10S45SP" TO-277A 8.8,60.8 r0 bottom
VD2 "1N5817WS" SOD323 40.2,57.1 r0 bottom
VD3 "MMSZ5231B-TP" SOD123 41.7,71.8 r0 bottom
X1 "796683-2" 796683-2 25,92.5 r180 top
X2 "DS1066-03M (MW-3M)" MW-3M 37.3,77.1 r180 top
X3 "DS1069-2M (CWF-2)" CWF-2 37.05,83.875 r0 top
X4 "DS1066-03M (MW-3M)" MW-3M 43.65,54.1 r90 top
X5 "DS1069-2M (CWF-2)" CWF-2 43.539,44.393 r45 top
X6 "DS1066-03M (MW-3M)" MW-3M 13.9,46.2 r180 top
X7 "796683-2" 796683-2 7.4,28.9 r90 top
X8 "796683-2" 796683-2 29.9,38.2 r90 top

## Footprints (in the part's own frame and the unit in brackets; to place one, negate y for a bottom-side part, rotate by r counter-clockwise, add the part's x,y. Pads: shape width x height; smd on the part's side, far side on the other; paste and mask are expansions set on the pad)
796683-2 [mm]
  rect 3x3 hole 0.5: 1(-2.5,0)
  round 3 hole 0.5: 2(2.5,0)
  silkscreen extent -5,-4.39 5.5,4.7, body extent -5,-4.38 5.5,4.62, height 15.2
C0603 [mm] "Chip Capacitor, 2-Leads, Body 1,60x0,80mm, IPC Medium Density"
  rrect50% 0.85x0.95 smd: 1(-0.675,0) 2(0.675,0)
  Top Layer pour cut-out: -0.254,0.5 -0.254,-0.5 0.254,-0.5 0.254,0.5
  silkscreen extent -1.35,-0.75 1.35,0.75, body extent -0.85,-0.45 0.85,0.45, height 0.9
C1206 [mm] "Chip Capacitor, 2-Leads, Body 3,20x1,60mm, IPC Medium Density"
  rrect50% 1.05x1.8 smd: 1(-1.525,0) 2(1.525,0)
  Top Layer pour cut-out: -0.6,0.95 -0.6,-0.95 0.6,-0.95 0.6,0.95
  silkscreen extent -2.3,-1.15 2.3,1.15, body extent -1.6,-0.8 1.6,0.8, height 1.25
CAPALUM_10x12.5 [mm] "Электролитический алюминиевый конденсатор с радиальными выводами 10*12.5мм"
  round 1.6 hole 0.8: 1(7.3,2.25) 2(7.3,-2.75)
  silkscreen extent -8.2,-5 5.8,5, body extent -8.2,-5 7.6,5, height 9
CDRH124 [mm]
  rect 3x5.3 smd: 1(-4.9,0) 2(4.9,0)
  silkscreen extent -6,-6 6,6, body extent -6.1,-6.15 6.2,6.15, height 4.6
CWF-2 [mm]
  rect 1.6x1.6 hole 0.5: 1(-1.25,-0.675)
  round 1.6 hole 0.5: 2(1.25,-0.675)
  silkscreen extent -3.75,-2.88 3.75,2.88, body extent -3.75,-2.87 3.75,2.88, height 7
MW-3M [mm]
  rect 1.7x1.7 hole 0.5: 1(-2,-0.45)
  round 1.7 hole 0.5: 2(0,-0.45) 3(2,-0.45)
  silkscreen extent -4,-2.25 4,2.25, body extent -3.95,-2.25 3.95,2.25, height 6
PAD_5_8mm [mm] "Площадка для пайки 5x5 мм"
  rrect50% 5x8 smd: 1(0,0)
R0603 [mm]
  rect 0.7x1 smd: 1(-0.75,0) 2(0.75,0)
  silkscreen extent -1.33,-0.73 1.33,0.73, body extent -0.8,-0.43 0.8,0.43, height 0.45
R1206 [mm] "Chip Resistor, 2-Leads, Body 3,10x1,60mm, IPC Medium Density"
  rect 1.2x1.7 smd: 1(-1.35,0) 2(1.35,0)
  silkscreen extent -2.2,-1.1 2.2,1.1, body extent -1.6,-0.8 1.6,0.8, height 0.6
SOD123 [mm]
  rect 0.9x1.2 smd: 1(-1.6,0) 2(1.6,0)
  silkscreen extent -1.52,-0.9 1.5,0.89, body extent -1.85,-0.8 1.85,0.8, height 1.27
SOD323 [mm]
  rect 0.6x0.8 smd: 1(-1.6,0) 2(0.75,0)
  silkscreen extent -2,-0.6 0.9,0.87, body extent -1.68,-0.68 0.82,0.67, height 1
SOIC-8 [mm] "LMV358"
  oval 1.45x0.85 smd: 1(-2.725,1.905) 2(-2.725,0.635) 3(-2.725,-0.635) 4(-2.725,-1.905) 5(2.725,-1.905) 6(2.725,-0.635) 7(2.725,0.635) 8(2.725,1.905)
  silkscreen extent -2.85,-2.5 1.6,3.01, body extent -3,-2.45 3,2.45, height 1.75
"SOIC-8 with PAD" [mm]
  oval 1.45x0.85 smd: 1(0,0)
  rect 1.45x0.85 smd: 2(0,-1.27) 3(0,-2.54) 4(0,-3.81) 5(5.45,-3.81) 6(5.45,-2.54) 7(5.45,-1.27) 8(5.45,0)
  rect 2.2x4 smd: TP(2.725,-1.905)
  silkscreen extent -0.12,-4.41 4.33,1.1, body extent -0.28,-4.36 5.73,0.55, height 1.75
TO-277A [mm] "SMPC (TO-277A)"
  rrect1% 1.27x1.4 smd: 1(-2.76,1.04) 2(-2.76,-1.04)
  rrect1% 4.8x4.72 smd: 3(1,0)
  silkscreen extent -3.25,-2.3 3.73,2.7, body extent -3.25,-2.3 3.25,2.3, height 1.2

## Part data
C1: library part CC1206KKX7R8BB106, "Конденсатор кер. 10мкФ 25В", Manufacturer=Yageo, Voltage=25В, Name=CC1206KKX7R8BB106, TKE=X7R
C2 C4 C6: library part CC0603JPX7R9BB104, "Конденсатор кер. 0,1мкФ 50В", Manufacturer=Yageo, Voltage=50В, Name=CC0603JPX7R9BB104, TKE=X7R
C3: library part CC0603JRNPO9BN101, "Конденсатор кер. 100пФ 50В", Manufacturer=Yageo, Voltage=50В, Name=CC0603JRNPO9BN101, TKE=NP0
C5: library part B41858C6157M, "Конденсатор эл.лит. алюм. 150мкФ 50В", Manufacturer=EPCOS, Voltage=50В, ESR=0,3Ом, Name=B41858C6157M
DA1: "Сдвоенный операционнй усилитель 2.7-5В CMOS Rail-to-rail", Manufacturer=TI, Name=LMV358IDR
DD1: "регулируемый стабилизатор напряжения", Name=MP1584EN
L1: "Катушка с сердечником 4,7мкГн 0,8А", I saturation=5,7А, Name=CDRH124NP-4R7MC, R=0,014
R1: library part RC0603FR-07220KL, "Резистор 220кОм 0,1Вт 1%", Manufacturer=YAGEO, Tolerance=1%, Name=RC0603FR-07220KL
R2: library part RC0603FR-07100KL, "Резистор 100кОм 0,1Вт 1%", Manufacturer=YAGEO, Tolerance=1%, Name=RC0603FR-07100KL
R3: library part RC0603FR-074K7L, "Резистор 4,7кОм 0,063Вт 1%", Manufacturer=YAGEO, Tolerance=1%, Name=RC0603FR-074K7L
R4 R6: library part RC0603FR-071K1L, "Резистор 1,1кОм 0,063Вт 1%", Manufacturer=YAGEO, Tolerance=1%, Name=RC0603FR-071K1L
R5 R7 R8 R10: library part RC1206FR-07180KL, "Резистор 180к 0,25Вт 1%", Manufacturer=YAGEO, Name=RC1206FR-07180KL
R9: library part RC0603FR-071KL, "Резистор 1кОм 0,063Вт 1%", Manufacturer=YAGEO, Tolerance=1%, Name=RC0603FR-071KL
R11: library part RC0603FR-0747KL, "Резистор 47кОм 0,063Вт 1%", Manufacturer=YAGEO, Tolerance=1%, Name=RC0603FR-0747KL
VD1: "Диод Шоттки 45В 10А", Manufacturer=YFW, Name=10S45SP
VD2: "Диод Шоттки 1N5817WS 20V 1А 0.45V", current=1A, drop voltage=0,45В, Voltage=20В, Name=1N5817WS, Производитель="Hottech Co. Ltd"
VD3: "Стабилитрон 5,1В", Name=MMSZ5231B-TP
X1 X7 X8: "Винтовой клеммник (наборный 2х2)", Name=796683-2
  X1: Contact_1=+24V, Contact_2=GND
  X7: Contact_1=VOUT, Contact_2=GND_OUT
  X8: Contact_1=GND_OUT, Contact_2=GND
X2 X4 X6: library part MW-3M, "Разъем - 3 конт. прямая вилка на плату", Contact_1=VCC, Contact_3=GND, Name="DS1066-03M (MW-3M)"
  X2: Contact_2=V_SENSE
  X4 X6: Contact_2=SIGNAL
X3 X5: library part CWF-2, "Разъем - 2 конт. прямая вилка на плату", Name="DS1069-2M (CWF-2)"
  X3: Contact_1=VCC, Contact_2=GND
  X5: Contact_1=LED+, Contact_2=LED-

## Free pads (board coordinates)
  round 6.4 hole 3.2: 4(5,95) 5(45,95) 6(45,5) 7(5,5)

## Via types
v1: diameter 2, hole 0.5, Top Layer to Bottom Layer, tented both sides, 8 vias

## Nets (pads, with @x,y where several pads share a name; then routed paths per layer and width w, separated by ;. In a path a pad name is that pad's centre, name@x,y a point inside that pad or via, vN(x,y) a via of type N, cw(c..) or ccw(c..) an arc to the next point about the centre after c; other vN are vias at no path point)
+5,1В: C4.2 DA1.8 R11.2 VD3.1 | length 7.1
  Bottom Layer w0.5: R11.2 VD3.1 40.1,70.018 40.393,69.725 C4.2 ; DA1.8 C4.2@41.905,69.722
GND: 2.1 C1.1 C4.1 DA1.4 DD1.5 DD1.TP R1.1 R2.2 R3.1 R5.1 R6.2 R9.1 VD1.1 VD1.2 VD3.2 X1.2 X2.2 X3.2 X6.3 | length 157.5
  Top Layer w0.5: v1(2.6,62.4) v1(30.6,62.4)
  Top Layer w0.6: v1(4.7,75) 4.8,74.9 29.5,74.9 v1(29.6,74.8)
  Bottom Layer w0.4: R5.1 4.2,48.7 6.25,46.65 X6.3 ; 45.5,66.1 45.6,66
  Bottom Layer w0.5: 23.1,96.1 26.1,99.1 38.2,99.1 40.6,96.7 40.6,83.2 ; v1@30.6,62.438 38.057,62.438 DA1.4 38.11,62.46 38.11,61.31 37.7,60.9 R6.2 ; X3.2 40.6,83.2 ; 40.555,83.245 40.6,83.2 ; C4.1 43.275,69.75 43.275,71.775 VD3.2 44.7,71.8 45.6,70.9 45.6,66 R3.1 46.9,59.4 47.7,58.6 R9.1 ; VD3.2@43.3,72 43.3,80.5 40.6,83.2
  Bottom Layer w0.6: v1(29.6,74.8) 36.1,74.8 37.3,76 X2.2
GND_OUT: 4.1 X7.2 X8.1
NetC2_1: C2.1 DD1.8 | length 3.6
  Bottom Layer w0.4: DD1.8 15.375,77.625 16.3,76.7 C2.1
NetC2_2: C2.2 DD1.1 L1.1 VD1.3 | length 2.4
  Bottom Layer w0.5: 16.3,71.8 C2.2
NetC3_1: C3.1 R2.1 | length 1.6
  Bottom Layer w0.5: R2.1 C3.1
NetC3_2: C3.2 DD1.3 | length 2.2
  Bottom Layer w0.5: C3.2 11.633,70.082 11.633,72.142 DD1.3
NetC5_2: C5.2 C6.1 R10.2 X6.1 X8.2 | length 10
  Bottom Layer w0.5: X6.1 20.75,46.65 22.1,48 R10.2
NetDA1_1: DA1.1 R4.1 VD2.2 | length 6.3
  Bottom Layer w0.5: VD2.2 41.707,57.1 42,57.393 42,60.008 R4.1 42.005,60.995 41.905,61.095 DA1.1
NetDA1_2: DA1.2 R4.2 R6.1 | length 3.8
  Bottom Layer w0.5: R6.1 39.207,60.007 40.499,60.007 R4.2 40.505,61.005 40.635,61.135 DA1.2
NetDA1_3: DA1.3 X6.2 | length 43.5
  Top Layer w0.5: v1(13.9,43.9) 22.3,43.9 34.138,55.738 v1(34.138,64.438)
  Bottom Layer w0.5: v1(13.9,43.9) X6.2 ; v1(34.138,64.438) 38.862,64.438 39.365,63.935 DA1.3
NetDD1_4: DD1.4 VD2.1 X4.2 | length 55.5
  Top Layer w0.5: v1(8.4,71.9) 33.3,71.9 38.6,66.6 v1(38.6,54.1)
  Bottom Layer w0.5: v1(8.4,71.9) 8.675,72.175 DD1.4 ; VD2.1 v1(38.6,54.1) X4.2
NetDD1_6: DD1.6 R1.2 | length 2.2
  Bottom Layer w0.5: DD1.6 11.683,77.642 11.683,79.782 R1.2
NetR3_2: R3.2 X4.3 | length 3.3
  Bottom Layer w0.5: X4.3 R3.2
NetR5_2: R5.2 R7.1
NetR7_2: R7.2 R8.1
NetR8_2: R8.2 R10.1
NetR9_2: R9.2 X5.2 | length 6.7
  Bottom Layer w0.5: X5.2 47.7,47.6 R9.2
VIN: 1.1 C1.2 DD1.7 R11.1 X1.1 X2.3 X3.1 | length 16.9
  Bottom Layer w0.6: X3.1 35.8,80.9 36.7,80 40.4,80 41.8,78.6 41.8,74.9 40.2,73.3 R11.1
VOUT: 3.1 C5.1 C6.2 L1.2 X2.1 X4.1 X5.1 X7.1 | length 33.7
  Bottom Layer w0.6: L1.2 25.1,68 26.3,69.2 32.5,69.2 39.3,76 X2.1 ; 39,46.8 39,47 X4.1
pads on no net: DA1.5 DA1.6 DA1.7 DD1.2

## Polygon pours and split planes (outlines as drawn)
GND_OUT on Bottom Layer "GND_OUT_L02_P008" (solid, pour order 8): 0.2,40.8 3,43.6 22,43.6 22.8,42.8 28.2,37.4 32.5,37.4 32.5,32.9 31.8,32.2 29.5,29.9 4.4,29.9 0.2,34.1 0.2,36
VOUT on Bottom Layer "VOUT_L02_P009" (solid, pour order 9): 33.7,32.3 30.2,28.8 3.5,28.8 0.1,25.4 0.1,19 2.4,16.7 36.2,16.7 44.4,24.9 44.4,43 32.3,55.1 32.3,57.2 28.9,60.6 28.9,64.2 27.4,65.7 22.3,65.7 21.1,64.5 21.1,56.5 24,53.6 27,53.6 33.7,46.9
GND on Bottom Layer "GND_L02_P001" (solid, pour order 1): 4.8,50.15 3.4,50.15 0.4,50.15 0.4,90.3 1.5,91.4 6.7,91.4 8.9,93.6 8.9,95.9 10.8,97.8 22.8,97.8 23.8,96.8 23.8,87.2 22.1,85.5 12.3,85.5 10.7,83.9 10.7,80.6 10.6,80.5 10.6,79.1 10.9,78.8 10.899,76.9 9.8,76.9 9.8,76.1 15.3,76.1 15.3,73.7 15.2,73.6 7.9,73.6 6.9,72.6 6.9,71.4 7.8,70.5 8.4,70.5 8.9,70 8.9,67.4 8.4,66.9 7.8,66.9 6.5,65.6 6.5,57.5 4.8,55.8
NetC5_2 on Bottom Layer "NETC5_2_L02_P007" (solid, pour order 7): 24.8,49.1 21.8,49.1 21.2,49.7 21.2,52.7 21.7,53.2 26.8,53.2 32.4,47.6 32.4,39.2 28.7,39.2 27,40.9 27,46.9
NetR8_2 on Bottom Layer "NETR8_2_L02_P006" (solid, pour order 6): 16,52.7 16.6,53.3 19.9,53.3 20.5,52.7 20.5,49.7 19.9,49.1 16.7,49.1 16,49.8
NetR7_2 on Bottom Layer "NETR7_2_L02_P005" (solid, pour order 5): 10.9,52.6 11.6,53.3 14.9,53.3 15.5,52.7 15.5,49.7 14.9,49.1 11.7,49.1 10.9,49.9
NetR5_2 on Bottom Layer "NETR5_2_L02_P004" (solid, pour order 4): 5.8,52.6 6.5,53.3 9.8,53.3 10.4,52.7 10.4,49.7 9.8,49.1 6.6,49.1 5.8,49.9
NetC2_2 on Bottom Layer "NETC2_2_L02_P003" (solid, pour order 3): 9,55.4 7.9,56.5 7.9,65.1 8.6,65.8 10.6,65.8 13.2,68.4 13.2,70.8 13.7,71.3 13.7,73 17.3,73 19.3,71 19.3,56.5 18.2,55.4
VIN on Bottom Layer "VIN_L02_P002" (solid, pour order 2): 35.9,78.6 36.8,79.5 36.8,82.1 36.8,85.5 39,87.7 39,96.2 37.4,97.8 27.2,97.8 26.2,96.8 26.2,87.8 22.7,84.3 13.5,84.3 12.6,83.4 12.6,80.6 12.5,80.5 12.5,76.7 13.5,76.7 13.5,78.6 14.2,79.3 31,79.3 33.4,76.9 35.9,76.9

## Silkscreen, mask and mechanical layers (free items; w line width, h text height)
Board Shape:
  circle w0.013: c45,5 r1.6
  circle w0.013: c5,5 r1.6
  circle w0.013: c45,95 r1.6
  circle w0.013: c5,95 r1.6
  lines w0.013: 0,20 25,20 25,100 ; 10,20 10,0 0,0 ; 0,0 50,0 ; 0,0 50,0 ; 0,0 0,100 ; 0,0 0,100 ; 0,100 50,100 ; 0,100 50,100 ; 50,0 50,100
PhotoMask:
  rectangle: 0,0 50,100